# EAGLE board Motherboard 8bot_16mil (EAGLE 9.2.0)
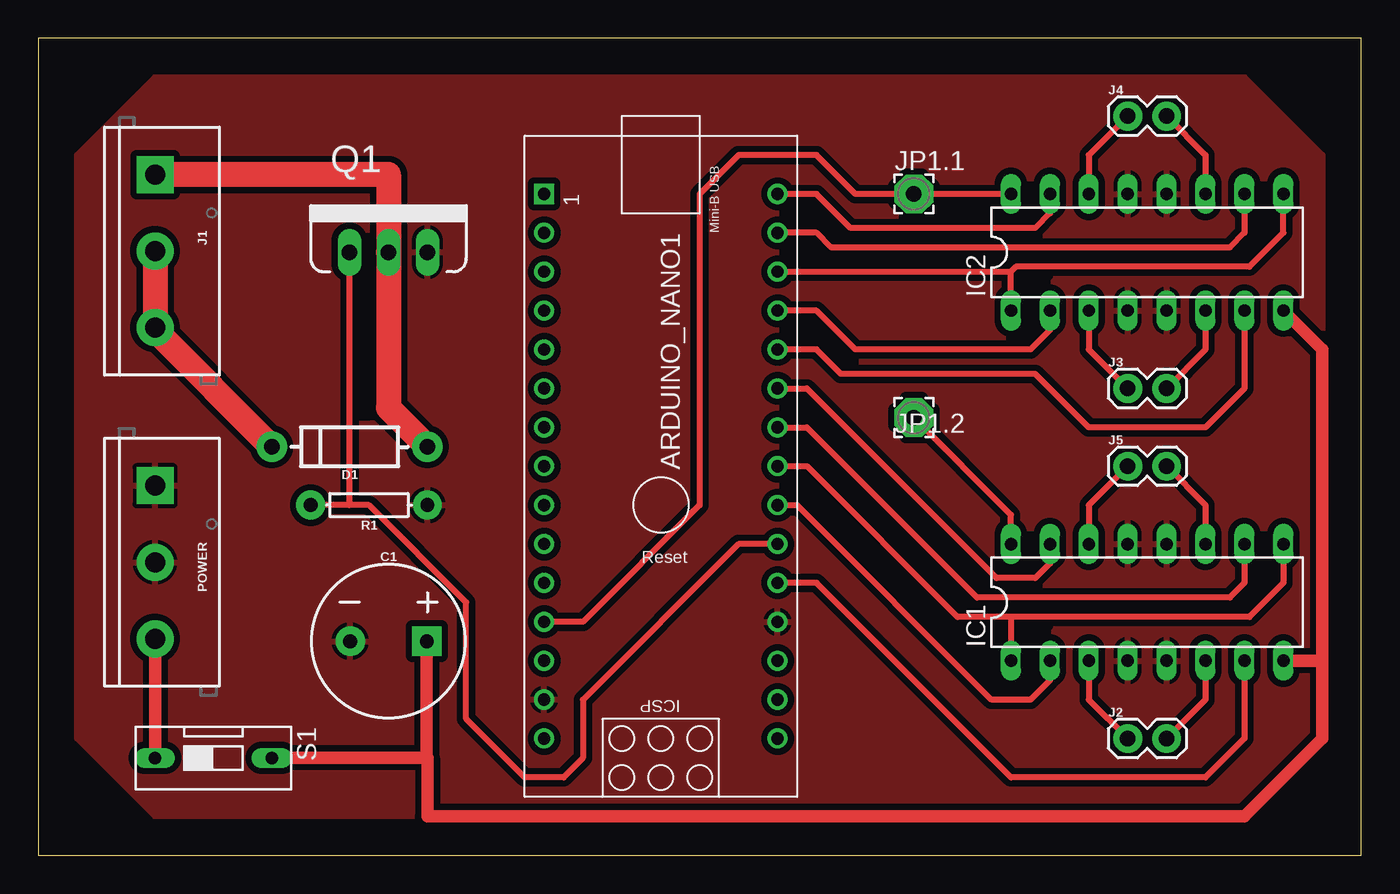
[diagram p0: board, top side]

Size 86.36 x 53.34 mm. Coordinates in mm from the lower left corner, seen from the top.
Outline: 0,0 86.36,0 86.36,53.34 0,53.34 0,0
Copper layers (1*16): Top 0.035mm / dielectric 1.5mm / Bottom 0.035mm
Design rules "default *": minimum track width 16mil, minimum drill 0.44mm, track to track 16mil, track to pad 16mil, pad to pad 16mil, via to via 16mil, smd to smd 16mil, copper to edge 40mil, drill to drill 16mil, minimum pad ring 10mil, minimum via ring 8mil, stop-mask expansion 4mil, vias tented up to drill 0mil, thermal gap 10mil
Net classes: 1 9V: width 0.813 mm; 2 36V: width 1.626 mm, clearance 0.61 mm
tRestrict: area 21,28.6 to 21.6,37.5; area 48.6,40.3 to 52.4,42.5; area 48.6,32.1 to 53.3,34.9; area 48.6,38.7 to 51.8,40; area 78.1,16.2 to 80.6,21; area 78.1,39.1 to 80.6,43.8; area 64.5,41.6 to 65.1,43.8; area 64.5,18.7 to 65.1,21; area 64.1,10.8 to 66,14.9; area 48.6,17.5 to 61.9,29.8; area 48.6,16.2 to 60.6,27.3; area 48.6,10.8 to 62.9,24.8; 1 more areas

## Footprints (pad centres in the part's own frame; a part is rotated, then mirrored left to right if it is on the bottom)
ARDUINO_NANO = drill 0.8 square: 1 -20.32,-7.62 | drill 0.8: 2 -17.78,-7.62; 3 -15.24,-7.62; 4 -12.7,-7.62; 5 -10.16,-7.62; 6 -7.62,-7.62; 7 -5.08,-7.62; 8 -2.54,-7.62; 9 0,-7.62; 10 2.54,-7.62; 11 5.08,-7.62; 12 7.62,-7.62; 13 10.16,-7.62; 14 12.7,-7.62; 15 15.24,-7.62; 16 15.24,7.62; 17 12.7,7.62; 18 10.16,7.62; 19 7.62,7.62; 20 5.08,7.62; 21 2.54,7.62; 22 0,7.62; 23 -2.54,7.62; 24 -5.08,7.62; 25 -7.62,7.62; 26 -10.16,7.62; 27 -12.7,7.62; 28 -15.24,7.62; 29 -17.78,7.62; 30 -20.32,7.62
CPOL-RADIAL-5MM-10MM = drill 0.9 pad 1.93 square: + 2.5,0 | drill 0.9 pad 1.93: - -2.5,0
DIODE-1N4001 = drill 1 pad 1.981: A -5.08,0; C 5.08,0
DIL16 = drill 0.813 long: 1 -8.89,-3.81; 2 -6.35,-3.81; 3 -3.81,-3.81; 4 -1.27,-3.81; 5 1.27,-3.81; 6 3.81,-3.81; 7 6.35,-3.81; 8 8.89,-3.81; 9 8.89,3.81; 10 6.35,3.81; 11 3.81,3.81; 12 1.27,3.81; 13 -1.27,3.81; 14 -3.81,3.81; 15 -6.35,3.81; 16 -8.89,3.81
SCREWTERMINAL-5MM-3 = drill 1.3 pad 2.413 square: 1 0,0 | drill 1.3 pad 2.413: 2 5,0; 3 10,0
1X02 = drill 1.016 pad 1.88: 1 0,0; 2 2.54,0
2,54/1,0 = drill 1.016 pad 2.54 octagon: 1 0,0
TO220V = drill 1.016 long: 1 -2.54,0; 2 0,0; 3 2.54,0
AXIAL-0.3 = drill 0.9 pad 1.88: P$1 -3.81,0; P$2 3.81,0
DS-01 = drill 0.813 long: 1 0,-3.81; 2 0,3.81

## Placement (x,y rotation side)
ARDUINO_NANO1  [ARDUINO_NANO]  40.64,22.86 270 top
C1  1mF  [CPOL-RADIAL-5MM-10MM]  22.86,13.97 0 top
D1  1A/50V/1.1V  [DIODE-1N4001]  20.32,26.67 180 top
IC1  L293D  [DIL16]  72.39,16.51 0 top
IC2  L293D  [DIL16]  72.39,39.37 0 top
J1  [SCREWTERMINAL-5MM-3]  7.62,44.45 270 top
J2  [1X02]  71.12,7.62 0 top
J3  [1X02]  71.12,30.48 0 top
J4  [1X02]  71.12,48.26 0 top
J5  [1X02]  71.12,25.4 0 top
JP1.1  WIREPAD2,54/1,0  [2,54/1,0]  57.15,43.18 0 top
JP1.2  WIREPAD2,54/1,0  [2,54/1,0]  57.15,28.57 0 top
POWER  [SCREWTERMINAL-5MM-3]  7.62,24.13 270 top
Q1  60V/32A/35mΩ  [TO220V]  22.86,39.37 0 top
R1  10k  [AXIAL-0.3]  21.59,22.86 180 top
S1  [DS-01]  11.43,6.35 270 top

## Library data of the parts
ARDUINO_NANO1 = ArduinoNanoV30
C1 = SparkFun-Capacitors; PROD_ID: CAP-09538
D1 = SparkFun-DiscreteSemi; PROD_ID: DIO-09176
IC1 IC2 = st-microelectronics; MPN: L293D; OC_FARNELL: 9589619; OC_NEWARK: 56P8249
J1 POWER = SparkFun-Connectors; PROD_ID: CONN-10134; SF_SKU: PRT-08433
J2-J5 = SparkFun-Connectors
JP1.1 JP1.2 = wirepad
Q1 = SparkFun-DiscreteSemi; PROD_ID: TRANS-10060
R1 = SparkFun-Resistors; PROD_ID: RES-09435
S1 = switch-dil; OC_FARNELL: unknown; OC_NEWARK: unknown

## Nets
3.3V: ARDUINO_NANO1.2
5V: ARDUINO_NANO1.12 IC2.16 JP1.1.1
36V [36V]: D1.C J1.2 J1.3
+9V [9V]: C1.+ IC1.8 IC2.8 S1.2
EN1: ARDUINO_NANO1.23 IC1.1 IC1.9
EN2: ARDUINO_NANO1.28 IC2.1 IC2.9
GND: ARDUINO_NANO1.14 ARDUINO_NANO1.19 C1.- IC1.4 IC1.5 IC1.12 IC1.13 IC2.4 IC2.5 IC2.12 IC2.13 POWER.1 POWER.2 Q1.3 R1.P$1
N$1: ARDUINO_NANO1.21 Q1.1 R1.P$2
N$2: IC1.3 J2.1
N$3: IC1.6 J2.2
N$4: IC1.14 J5.1
N$5: IC1.11 J5.2
N$6: ARDUINO_NANO1.20 IC1.7
N$7: ARDUINO_NANO1.22 IC1.2
N$8: ARDUINO_NANO1.24 IC1.10
N$9: IC2.3 J3.1
N$10: IC2.6 J3.2
N$11: IC2.14 J4.1
N$12: IC2.11 J4.2
N$13: IC1.16 JP1.2.1
N$14: ARDUINO_NANO1.27 IC2.2
N$15: ARDUINO_NANO1.25 IC1.15
N$16: ARDUINO_NANO1.29 IC2.10
N$17: ARDUINO_NANO1.26 IC2.7
N$18: ARDUINO_NANO1.30 IC2.15
N$20 [9V]: POWER.3 S1.1
SOLENOID [36V]: D1.A J1.1 Q1.2
VIN: ARDUINO_NANO1.15

## Tracks (layer width: path | path; a pad name or v marks a point on that pad's centre or on a via)
5V
  Top 0.406: IC2.16 JP1.1.1 53.34,43.18 50.8,45.72 45.72,45.72 43.18,43.18 43.18,22.86 35.56,15.24 ARDUINO_NANO1.12
36V
  Top 1.626: D1.C 7.62,34.29 J1.3 J1.2
+9V
  Top 0.813: 25.36,6.35 25.4,6.35 25.4,2.54 78.74,2.54 83.82,7.62 83.82,12.7 | 25.36,6.35 S1.2 | C1.+ 25.36,6.35 | 83.82,12.7 83.82,33.02 IC2.8 | 83.82,12.7 IC1.8
EN1
  Top 0.406: ARDUINO_NANO1.23 50.17,25.4 60.01,15.56 63.5,15.56 | 63.5,15.56 IC1.1 | IC1.9 81.28,17.78 79.06,15.56 63.5,15.56
EN2
  Top 0.406: IC2.9 81.28,40.64 79.06,38.42 63.82,38.42 63.5,38.1 | ARDUINO_NANO1.28 63.5,38.1 | IC2.1 63.5,38.1
GND
  pour Top: 2.54,7.62 2.54,45.72 7.62,50.8 78.74,50.8 83.82,45.72 83.82,7.62 78.74,2.54 7.62,2.54
N$1
  Top 0.406: ARDUINO_NANO1.21 45.72,20.32 35.56,10.16 35.56,6.35 34.29,5.08 31.75,5.08 27.94,8.89 27.94,16.51 21.59,22.86 20.32,22.86 | 20.32,22.86 Q1.1 | 20.32,22.86 R1.P$2
N$2
  Top 0.406: IC1.3 68.58,10.16 J2.1
N$3
  Top 0.406: J2.2 76.2,10.16 IC1.6
N$4
  Top 0.406: J5.1 68.58,22.86 IC1.14
N$5
  Top 0.406: IC1.11 76.2,22.86 J5.2
N$6
  Top 0.406: ARDUINO_NANO1.20 50.8,17.78 63.5,5.08 76.2,5.08 78.74,7.62 IC1.7
N$7
  Top 0.406: ARDUINO_NANO1.22 49.53,22.86 62.23,10.16 64.77,10.16 66.04,11.43 IC1.2
N$8
  Top 0.406: IC1.10 78.74,17.78 77.79,16.83 61.28,16.83 50.17,27.94 ARDUINO_NANO1.24
N$9
  Top 0.406: J3.1 68.58,33.02 IC2.3
N$10
  Top 0.406: IC2.6 76.2,33.02 J3.2
N$11
  Top 0.406: IC2.14 68.58,45.72 J4.1
N$12
  Top 0.406: IC2.11 76.2,45.72 J4.2
N$13
  Top 0.406: IC1.16 63.5,22.23 JP1.2.1
N$14
  Top 0.406: IC2.2 66.04,34.29 64.77,33.02 53.34,33.02 50.8,35.56 ARDUINO_NANO1.27
N$15
  Top 0.406: IC1.15 66.04,19.05 65.09,18.1 62.55,18.1 50.17,30.48 ARDUINO_NANO1.25
N$16
  Top 0.406: ARDUINO_NANO1.29 50.8,40.64 51.75,39.69 77.79,39.69 78.74,40.64 IC2.10
N$17
  Top 0.406: IC2.7 78.74,30.48 76.2,27.94 68.58,27.94 65.09,31.43 52.39,31.43 50.8,33.02 ARDUINO_NANO1.26
N$18
  Top 0.406: ARDUINO_NANO1.30 50.8,43.18 53.02,40.96 65.09,40.96 66.04,41.91 IC2.15
N$20
  Top 0.813: POWER.3 S1.1
SOLENOID
  Top 1.626: J1.1 22.86,44.45 Q1.2 22.86,29.21 D1.A